# Altium PCB uMultimeter_ExpProbeB_Pcb.PcbDoc
Units mil, origin at the board's own origin, x right, y up, seen from the top; angles counter-clockwise.
Board outline 815 x 1250 mil, 2 copper layers (Top Layer, Bottom Layer); 4 components, 19 nets, 28 pads, 1 vias.
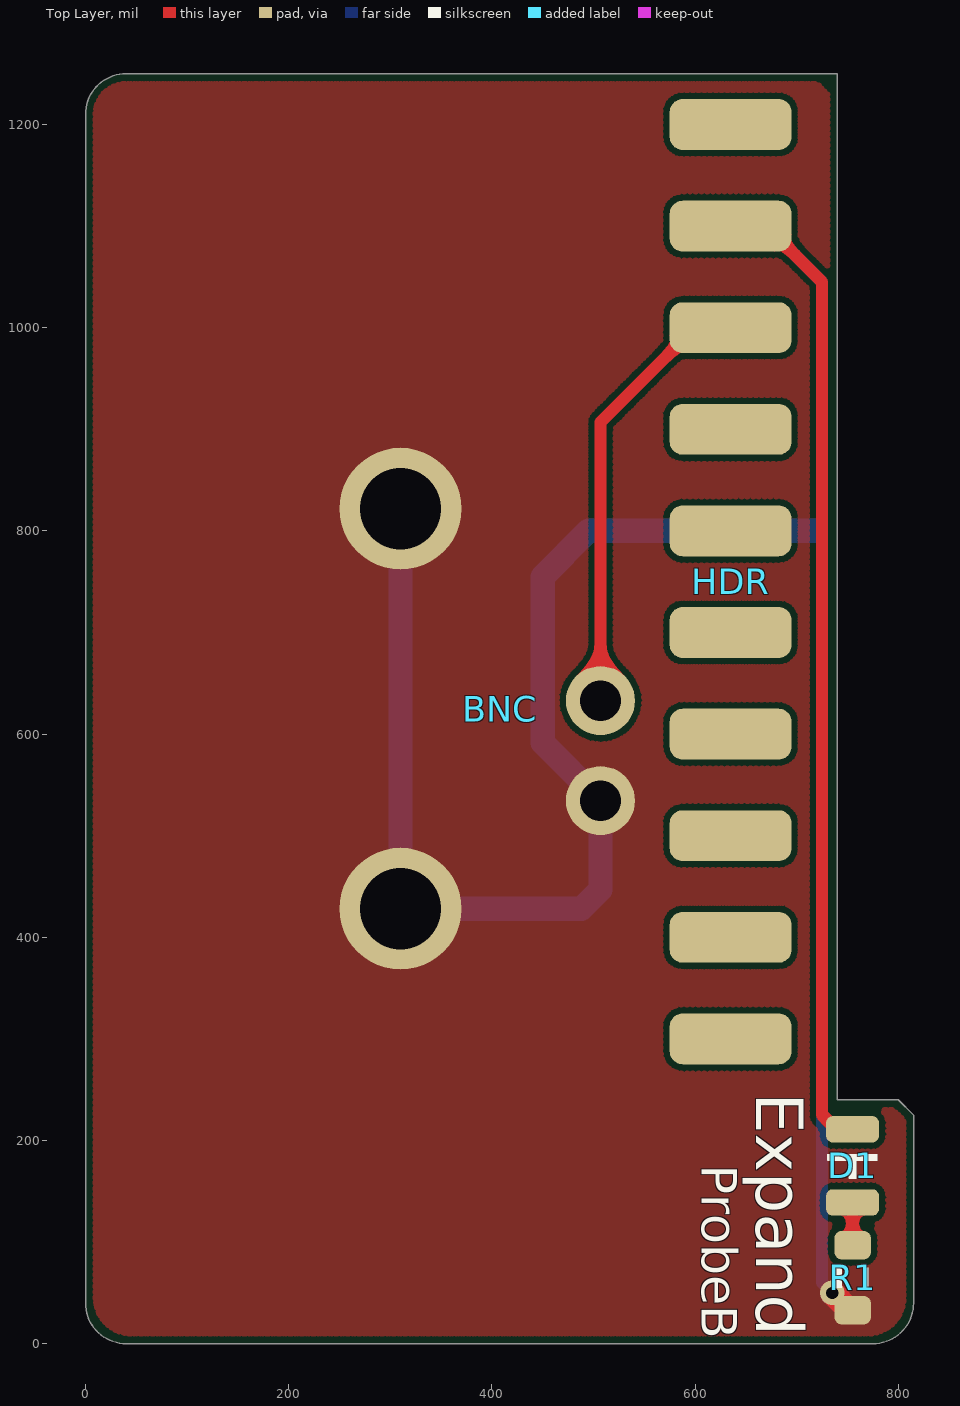
[diagram p0: Top Layer view]
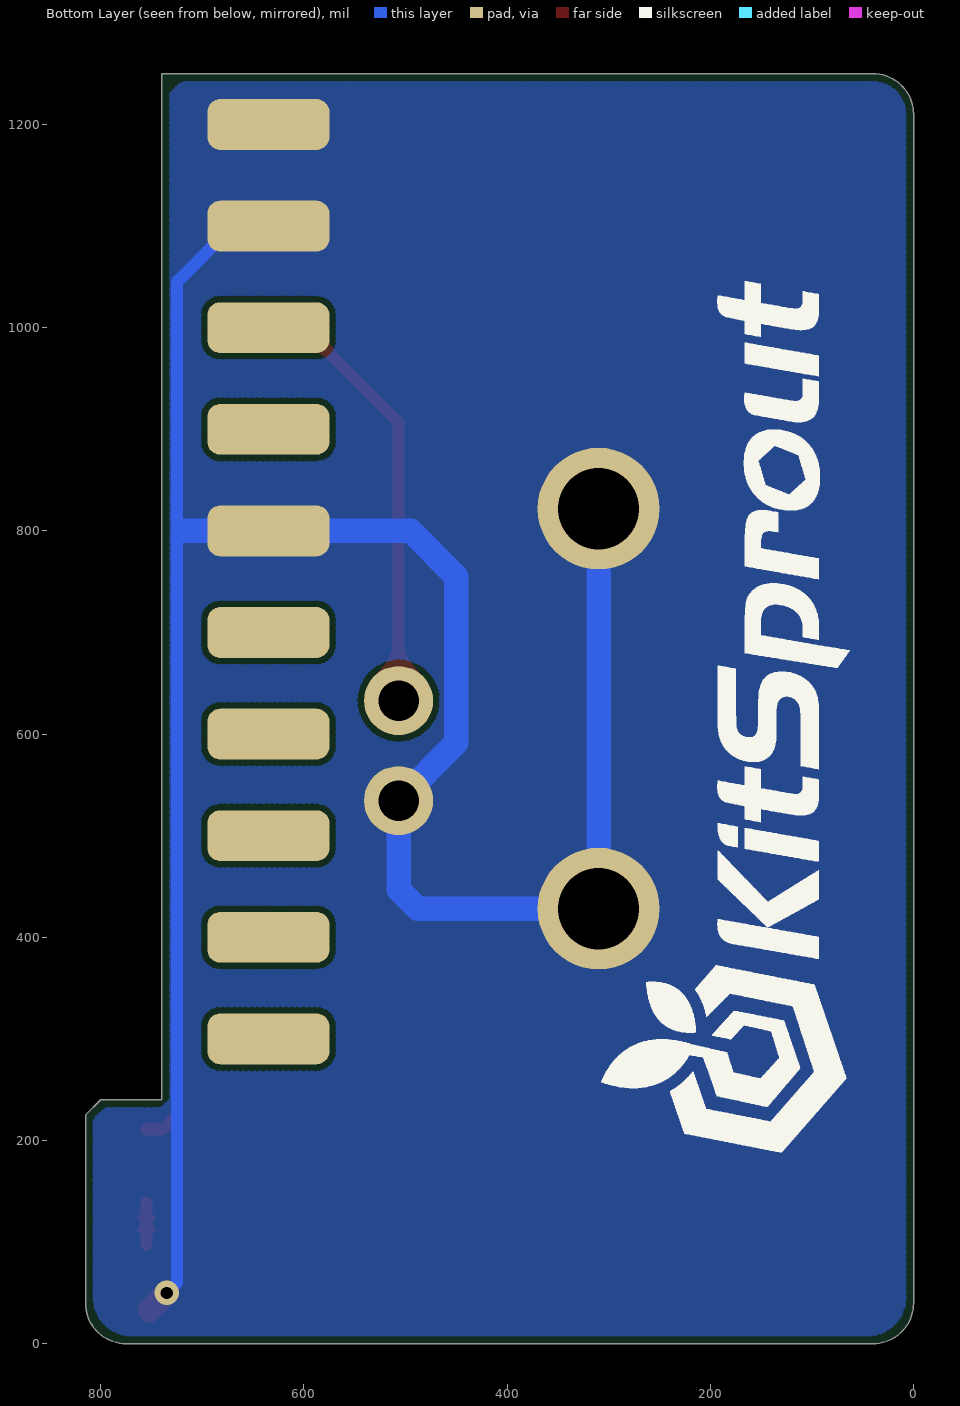
[diagram p1: Bottom Layer view, seen from below]

## Layer stack, top to bottom
Top Solder: solder mask 0.4, Solder Resist, Dk 3.5
Top Layer: signal copper 1.4
Dielectric1: dielectric 12.6, FR-4, Dk 4.8
Bottom Layer: signal copper 1.4
Bottom Solder: solder mask 0.4, Solder Resist, Dk 3.5

## Board outline
0,40 ccw(c40,40) 40,0 775,0 ccw(c775,40) 815,40 815,225 800,240 740,240 740,1250 40,1250 ccw(c40,1210) 0,1210

## Design rules (kind name [scope] priority, off if disabled: settings)
Clearance ClearancePolygon [InPolygon] p1: gap=6
Clearance [All] p2: gap=6
ComponentClearance [All] p1: gap=0 collisioncheckmode=3 verticalgap=0 showdistances=FALSE
Height [All] p1: minheight=0 maxheight=5000 prefheight=500
HoleSize [All] p1: absolutevalues=TRUE maxlimit=200 minlimit=1 maxpercent=80.000 minpercent=20.000
HoleToHoleClearance [All] p1: gap=6 allowstackedmicrovias=TRUE
MinimumSolderMaskSliver [All] p1: minsoldermaskwidth=4
PlaneConnect [All] p1: planeconnectstyle=Direct reliefexpansion=20 reliefentries=4 reliefconductorwidth=20 reliefairgap=10
PolygonConnect [All] p1: connectstyle=Direct reliefconductorwidth=20 reliefentries=4 polygonreliefangle="90 Angle" airgapwidth=10
RoutingVias [All] p1: holewidth=12 width=20 viastyle="Through Hole" minholewidth=12 minwidth=20 maxholewidth=100 maxwidth=200
SilkToSilkClearance [All] p1: silktosilkclearance=0
SilkToSolderMaskClearance SilkscreenOverComponentPads [IsPad] p1: minsilkscreentomaskgap=1 clearancetoexposedcopper=TRUE
SolderMaskExpansion [All] p1: expansion=2
Width [All] p1: maxlimit=64 minlimit=6 preferedwidth=10
22 further rules are at their usual default settings.

## Classes and differential pairs
component class uMultimeter_ExpProbeB_Sch: BNC D1 R1
component class EXP: HDR

## Components (designator, comment, footprint, x,y, rotation, side; value= is the part's Value field where it differs from the comment)
BNC "BNC" BNC_4P 310,625 r0 top
D1 "LED_0805" LED_0805_BLUE 755,175 r270 top
HDR "HDR2x10_2.54" HDR2X10_2.54_180H 635,1200 r0 top locked
R1 "Res_0603" RES_0603 755,65 r270 top

## Footprints (in the part's own frame and the unit in brackets; to place one, negate y for a bottom-side part, rotate by r counter-clockwise, add the part's x,y. Pads: shape width x height; smd on the part's side, far side on the other; paste and mask are expansions set on the pad)
BNC_4P [mil]
  round 120 hole 80: 0(0,-196.85) 0(0,196.85)
  round 68 hole 40: 1(196.85,7.87) 2(196.85,-90.55)
  body extent -1125,-290 250,290, height 519
HDR2X10_2.54_180H [mil]
  rrect50% 120x50 smd: 1(0,0) 3(0,-100) 5(0,-200) 7(0,-300) 9(0,-400) 11(0,-500) 13(0,-600) 15(0,-700) 17(0,-800) 19(0,-900)
  rrect50% 120x50 smd far side: 2(0,0) 4(0,-100) 6(0,-200) 8(0,-300) 10(0,-400) 12(0,-500) 14(0,-600) 16(0,-700) 18(0,-800) 20(0,-900)
  body extent -38,-950 415,50, height 100
LED_0805_BLUE [mil]
  rrect50% 26x52 smd: 1(-36,0) 2(36,0)
  silkscreen extent -12,-25 12,24, body extent -40,-25 40,25, height 43
RES_0603 [mil]
  rrect50% 28x36 smd: 1(-32,0) 2(32,0)
  silkscreen extent -10,-16 10,16, body extent -31,-16 32,16, height 20

## Part data
D1: "LED"
HDR: "Header"
R1: "Resistor"

## Via types
v1: diameter 24, hole 12, Top Layer to Bottom Layer, 1 vias

## Nets (pads, with @x,y where several pads share a name; then routed paths per layer and width w, separated by ;. In a path a pad name is that pad's centre, name@x,y a point inside that pad or via, vN(x,y) a via of type N, cw(c..) or ccw(c..) an arc to the next point about the centre after c; other vN are vias at no path point)
3V3: D1.1 HDR.3 | length 968.6
  Top Layer w12: HDR.3 670,1100 725,1045 725,225 739,211 D1.1
5V: HDR.1
GND: BNC.0 BNC.2 HDR.2 HDR.4 HDR.10 R1.2 | length 2318.6
  Top Layer w24: v1(735,50) R1.2@752,33
  Bottom Layer w12: HDR.4@670,1100 725,1045 725,60 v1(735,50)
  Bottom Layer w24: BNC.0@310,821.85 310,428.15 488.15,428.15 506.85,446.85 BNC.2 450,591.3 450,755 495,800 HDR.10 719,800
NetD1_2: D1.2 R1.1 | length 42
  Top Layer w12: R1.1 D1.2
NetHDR_6: HDR.6
NetHDR_7: HDR.7
NetHDR_8: HDR.8
NetHDR_9: HDR.9
NetHDR_11: HDR.11
NetHDR_12: HDR.12
NetHDR_13: HDR.13
NetHDR_14: HDR.14
NetHDR_15: HDR.15
NetHDR_16: HDR.16
NetHDR_17: HDR.17
NetHDR_18: HDR.18
NetHDR_19: HDR.19
NetHDR_20: HDR.20
PROBE_P: BNC.1 HDR.5 | length 440.7
  Top Layer w12: BNC.1 506.85,906.85 600,1000 HDR.5

## Polygon pours and split planes (outlines as drawn)
GND on Bottom Layer "Top Layer-No Net" (hatched 45Degree grid 4 track 6, remove dead copper, pour order 10): 730,1230 720,1240 40,1240 ccw(c40,1210) 10,1210 10,45 ccw(c45,45) 45,10 770,10 ccw(c770,45) 805,45 805,220 795,230 740,230 730,240 730,1230
GND on Top Layer "Top Layer-No Net" (hatched 45Degree grid 4 track 6, remove dead copper, pour order 12): 730,1230 720,1240 40,1240 ccw(c40,1210) 10,1210 10,45 ccw(c45,45) 45,10 770,10 ccw(c770,45) 805,45 805,220 795,230 740,230 730,240 730,1230

## Silkscreen, mask and mechanical layers (free items; w line width, h text height)
Top Overlay:
  text "Expand" at 645,246.93 h80 r270
  text "ProbeB" at 594.56,175.93 h60 r270
Bottom Overlay:
  drawing of 5028 lines, arcs and shapes, not listed
Mechanical 1:
  the board outline again, w2